# Altium PCB PCB.PcbDoc (part 2 of 2)
Units mm, origin at the board's own origin, x right, y up, seen from the top; angles counter-clockwise.
Board outline 100.25 x 100.25 mm, 2 copper layers (Top Layer, Bottom Layer); 95 components, 92 nets, 457 pads, 117 vias.
Unrouted connection lines stored in the file: 24.
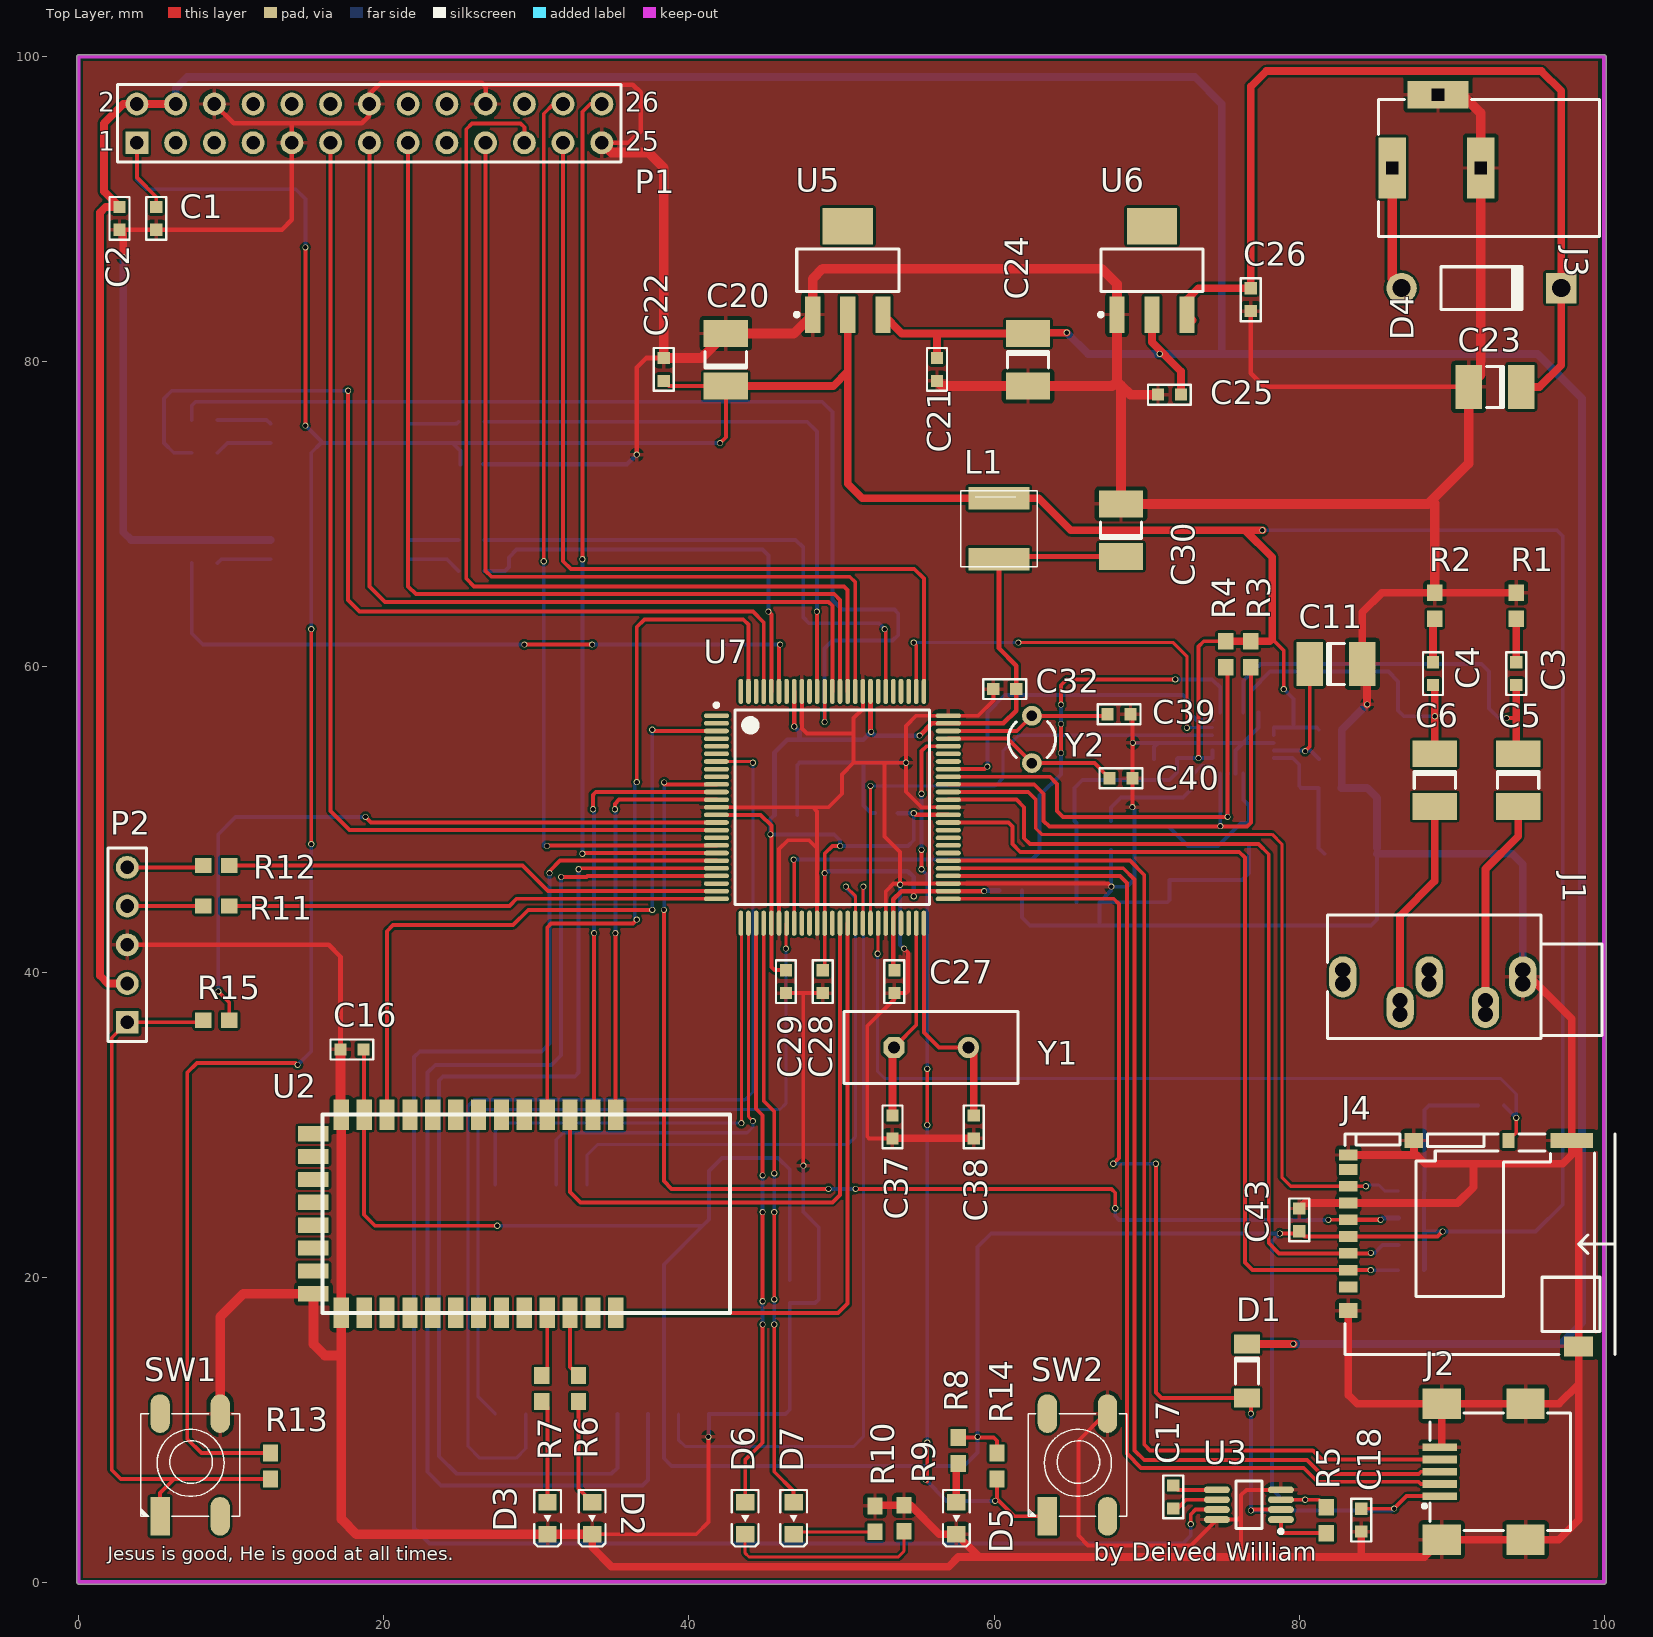
[diagram p0: Top Layer view]

## Via types
v1: diameter 0.4, hole 0.3, Top Layer to Bottom Layer, 117 vias

## Nets (pads, with @x,y where several pads share a name; then routed paths per layer and width w, separated by ;. In a path a pad name is that pad's centre, name@x,y a point inside that pad or via, vN(x,y) a via of type N, cw(c..) or ccw(c..) an arc to the next point about the centre after c; other vN are vias at no path point) (continued)
NetU2_11: (continued)
  Top Layer w0.254: U2.11 20.21,42.672 20.608,43.07 28.465,43.07 29.464,44.069 v1(37.592,44.069) ; v1(37.592,55.88) 37.672,55.8 U7.3
  Bottom Layer w0.254: v1(37.592,44.069) v1(37.592,55.88)
NetU2_34: U2.34 U7.40 | length 40.4
  Top Layer w0.254: U2.34 49.784,17.653 50.403,18.272 U7.40
NetU3_7: U3.7 U7.20 | length 117.4
  Top Layer w0.254: v1(30.861,46.482) 30.861,46.609 31.552,47.3 U7.20 ; v1(72.898,3.81) 72.898,4.445 73.208,4.755 U3.7
  Bottom Layer w0.254: v1(30.861,46.482) 30.861,35.306 30.353,34.798 22.352,34.798 21.971,34.417 21.971,3.556 22.987,2.54 72.39,2.54 72.898,3.048 v1(72.898,3.81)
NetU4_1: U4.1 U7.26 | length 33
  Top Layer w0.203: U7.26 43.434,43.169 v1(43.434,30.099)
  Bottom Layer w0.203: U4.1 27.305,29.591 27.813,30.099 v1(43.434,30.099)
NetU4_3: U4.3 U7.27 | length 29.7
  Top Layer w0.203: U7.27 43.903,30.519 v1(44.196,30.226)
  Bottom Layer w0.203: U4.3 31.305,29.019 31.75,29.464 43.815,29.464 44.196,29.845 v1(44.196,30.226)
NetU4_4: U4.4 U7.41 | length 39.4
  Top Layer w0.203: v1(50.292,45.593) 50.927,44.958 50.927,43.224 U7.41
  Bottom Layer w0.203: U4.4 33.305,27.971 34.036,28.702 50.419,28.702 50.927,29.21 50.927,44.831 50.292,45.466 v1(50.292,45.593)
NetU4_16: U4.16 U7.42 | length 52.8
  Top Layer w0.203: U7.42 51.403,45.561 v1(51.435,45.593)
  Bottom Layer w0.203: U4.16 39.305,9.336 39.751,8.89 50.8,8.89 51.435,9.525 v1(51.435,45.593)
NetU4_17: U4.17 U7.22 | length 76.6
  Top Layer w0.254: v1(31.623,46.228) 33.274,46.228 33.346,46.3 U7.22
  Bottom Layer w0.254: v1(31.623,46.228) 31.623,34.544 30.988,33.909 23.368,33.909 22.86,33.401 22.86,7.239 23.749,6.35 36.957,6.35 37.305,6.698 U4.17
NetU4_18: U4.18 U7.21 | length 72.2
  Top Layer w0.254: v1(32.766,46.736) 32.83,46.8 U7.21
  Bottom Layer w0.254: v1(32.766,46.736) 32.766,33.401 32.512,33.147 23.876,33.147 23.622,32.893 23.622,8.255 24.765,7.112 34.925,7.112 35.305,7.492 U4.18
NetU4_21: U4.21 U7.7 | length 72
  Top Layer w0.203: U7.7 44.117,53.8 v1(44.196,53.721)
  Bottom Layer w0.203: U4.21 29.305,8.763 28.67,8.128 26.289,8.128 25.527,8.89 25.527,31.242 25.908,31.623 43.688,31.623 44.196,32.131 v1(44.196,53.721)
NetU4_22: U4.22 U7.32 | length 52.5
  Top Layer w0.203: v1(46.355,41.529) 46.355,43.152 U7.32
  Bottom Layer w0.203: U4.22 26.162,12.178 26.162,30.734 26.416,30.988 45.974,30.988 46.355,31.369 v1(46.355,41.529)
NetU7_82: U7.82
OSCI: C37.2 U7.49 Y1.1 | length 13.3
  Top Layer w0.254: Y1.1@53.567,35.179 54.903,36.515 U7.49
  Top Layer w0.508: C37.2 53.34,34.952 Y1.1 Y1.1@53.567,35.179
OSCO: C38.2 U7.50 Y1.2 | length 15.1
  Top Layer w0.254: U7.50 55.403,36.037 56.388,35.052 Y1.2
  Top Layer w0.508: Y1.2 58.674,34.698 C38.2
SOSCI: C40.2 U7.72 Y2.2 | length 11.6
  Top Layer w0.254: U7.72 60.879,55.3 Y2.2 66.586,53.695 C40.2
SOSCO: C39.2 U7.73 Y2.1 | length 10.9
  Top Layer w0.254: U7.73 61.489,55.8 Y2.1 67.348,56.795 C39.2
VCC: C23.1 C26.2 D4.2 U6.3 | length 61.7
  Top Layer w0.508: U6.3@73.025,82.733 U6.3 72.658,84.088 73.394,84.824 C26.2 76.835,98.044 77.851,99.06 95.885,99.06 97.178,97.767 D4.2 97.178,79.779 95.758,78.359 C23.1
pads on no net: J4.1 J4.8 P1.3 P1.5 P1.7 P1.8 P1.10 P1.12 P1.16 P1.17 P1.18 P1.22 SW1.3 SW1.4 SW2.3 SW2.4 U1.9 U1.10 U1.14 U1.15 U1.21 U1.22 U1.23 U1.24 U2.5 U2.6 U2.7 U2.8 U2.9 U2.10 U2.14 U2.15 U2.16 U2.17 U2.18 U2.19 U2.20 U2.23 U2.24 U2.25 U2.26 U2.27 U2.28 U2.29 U2.30 U2.33 U4.2 U4.5 U4.6 U4.7 U4.9 U4.10 U4.11 U4.12 U4.13 U4.14 U4.19 U4.20 U5.4 U6.4 U7.1 U7.2 U7.4 U7.5 U7.6 U7.8 U7.9 U7.17 U7.23 U7.34 U7.35 U7.38 U7.47 U7.48 U7.57 U7.58 U7.59 U7.60 U7.69 U7.70 U7.78 U7.79 U7.80 U7.91 U7.94 U7.98 U7.100 U8.3 U8.4 U8.5 U8.6 U8.11 U8.12 U8.13 U8.14

## Polygon pours and split planes (outlines as drawn)
GND on Top Layer "Top Layer-No Net" (solid, pour order 8): 0.254,99.695 99.568,99.695 99.568,0.381 99.695,0.254 0.254,0.254
GND on Bottom Layer "Top Layer-No Net" (solid, pour order 10): 0.381,99.695 99.441,99.695 99.568,99.568 99.568,0.254 0,0.254

## Keep-outs
Keep-Out Layer:
  lines w0.254: 0,0 0,100 100,100 100,0 0,0

## Silkscreen, mask and mechanical layers (free items; w line width, h text height)
Top Overlay:
  text "Jesus is good, He is good at all times." at 1.905,1.143 h1.52
  text "by Deived William" at 66.548,1.016 h2
Bottom Overlay:
  text "Jesus is God." at 73.406,72.644 h1.52

## Text inside footprints (layer, text, board x,y; h text height)
J1: Mechanical 1 "Slot 1x1.9mm, PTH" at 101.243,46.058 h0.3 r270; Mechanical 1 "Assign keep-out area to slot" at 102.243,46.058 h0.3 r270; Mechanical 1 "Mech 1 - Slot cut-out" at 100.743,46.058 h0.3 r270; Mechanical 1 "Mech 2 - Clearance, move to internal plane if present" at 100.243,46.058 h0.3 r270
P1: Top Overlay "26" at 35.814,96.393 h1.27; Top Overlay "25" at 35.814,93.853 h1.27; Top Overlay "1" at 1.27,93.853 h1.27; Top Overlay "2" at 1.27,96.393 h1.27